# Altium PCB TailLightPrototypeRev3Lights.PcbDoc
Units mil, origin at the board's own origin, x right, y up, seen from the top; angles counter-clockwise.
Board outline 2835 x 1015 mil, 2 copper layers (Top Layer, Bottom Layer); 9 components, 41 nets, 27 pads, 415 vias.
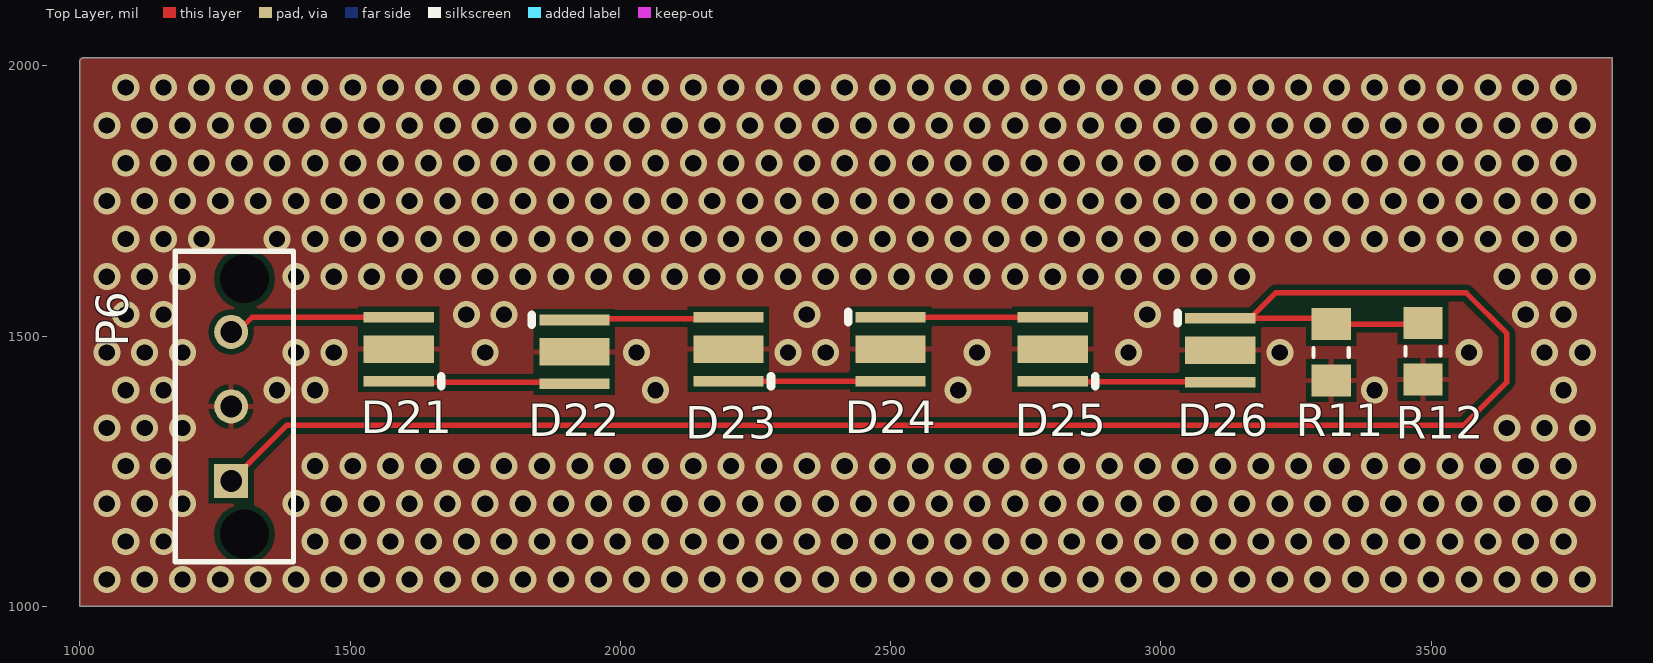
[diagram p0: Top Layer view]
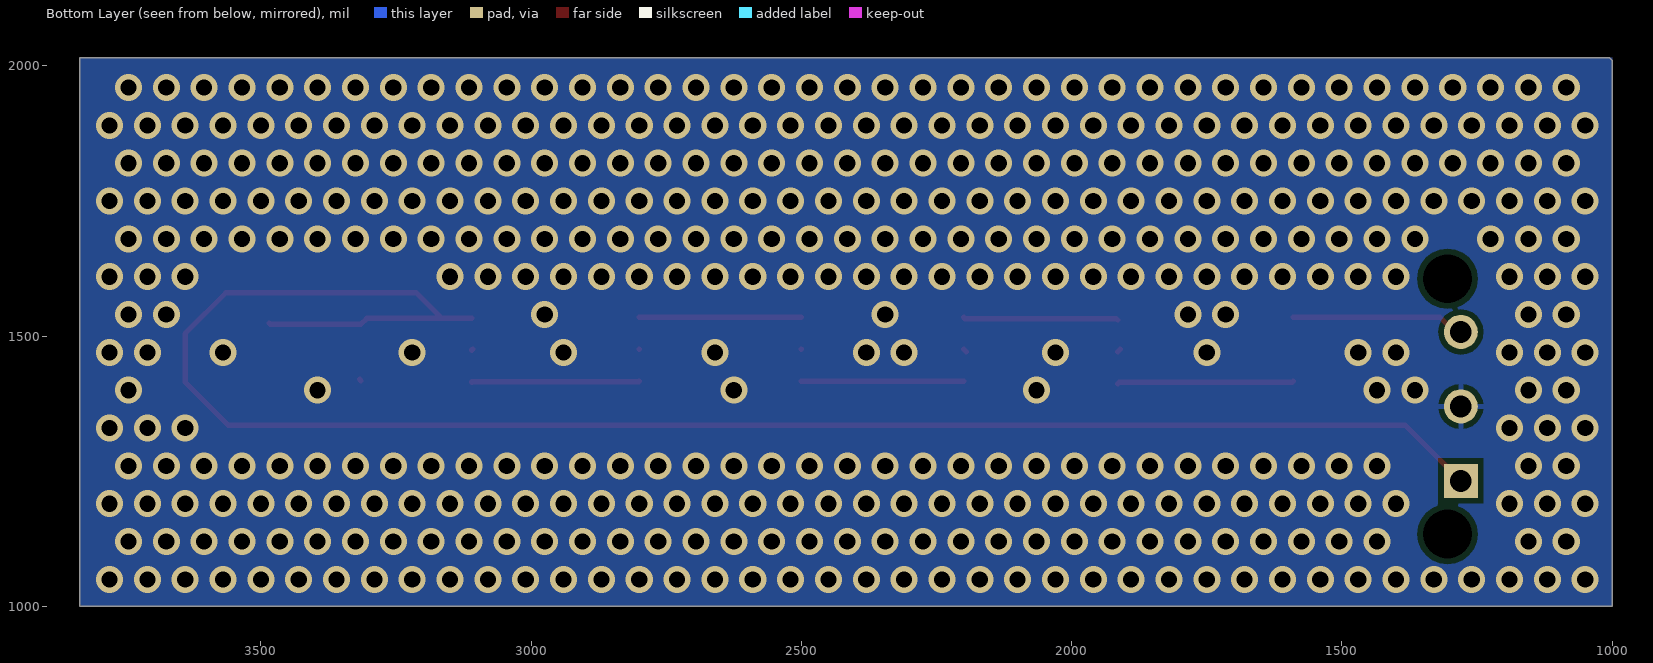
[diagram p1: Bottom Layer view, seen from below]
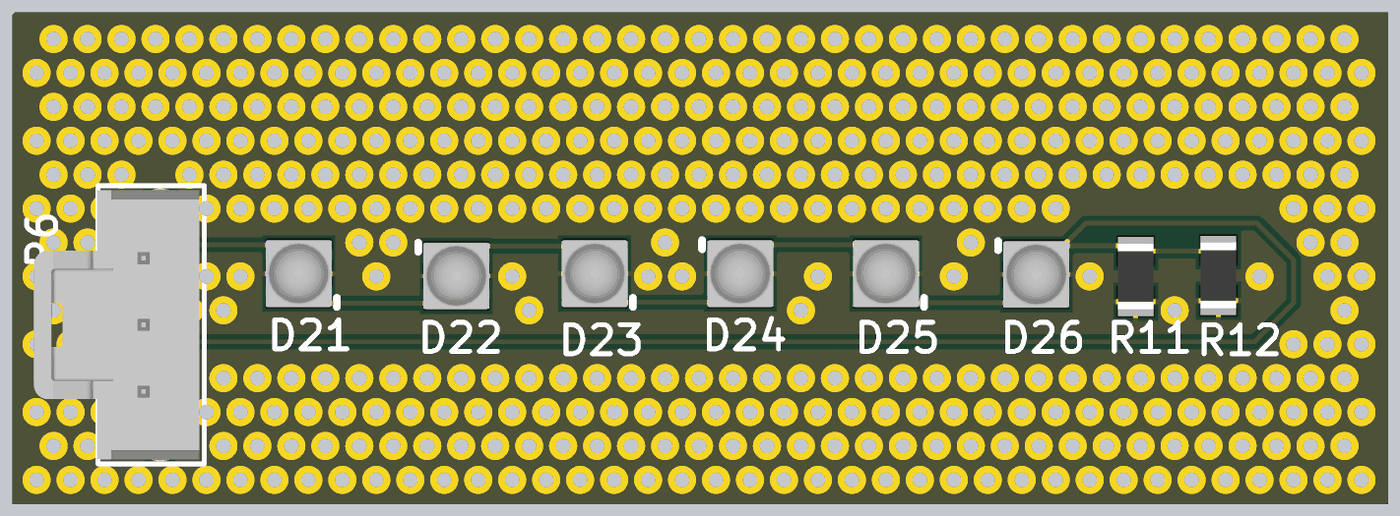
[diagram p2: 3D render of the assembled board from above, using the file's embedded part models]

## Layer stack, top to bottom
Top Solder: solder mask 0.4, Solder Resist, Dk 3.5
Top Layer: signal copper 1.4
Dielectric 1: dielectric 12.6, FR-4, Dk 4.8
Bottom Layer: signal copper 1.4
Bottom Solder: solder mask 0.4, Solder Resist, Dk 3.5

## Board outline
3835,2015 3835,1000 1000,1000 1000,2010 1005,2015

## Design rules (kind name [scope] priority, off if disabled: settings)
Clearance "Stitching GND_2" [IsStitchingVia and InNet('GND') vs (IsVia and (Not IsStitchingVia)) Or IsPad] p1: gap=10 ignorepadtopadclearanceinfootprint=FALSE
Clearance "Stitching GND_1" [IsStitchingVia and InNet('GND') vs (IsVia and (Not IsStitchingVia)) Or IsPad] p2: gap=10 ignorepadtopadclearanceinfootprint=FALSE
Clearance "Stitching GND" [IsStitchingVia and InNet('GND') vs (IsVia and (Not IsStitchingVia)) Or IsPad] p3: gap=10 ignorepadtopadclearanceinfootprint=FALSE
Clearance "Stitching No Net" [IsStitchingVia and InNet('No Net') vs (IsVia and (Not IsStitchingVia)) Or IsPad] p4: gap=5 ignorepadtopadclearanceinfootprint=FALSE
Clearance [All] p5: gap=10 ignorepadtopadclearanceinfootprint=FALSE except(0: Arc-Hole Track-Hole SMDPad-Hole THPad-Hole Via-Hole Fill-Hole Poly-Hole Region-Hole Text-Hole)
PolygonConnect [All] p1: connectstyle=Relief reliefconductorwidth=10 reliefentries=4 polygonreliefangle="90 Angle" airgapwidth=10
RoutingVias [All] p1: holewidth=28 width=50 viastyle="Through Hole" minholewidth=28 minwidth=50 maxholewidth=28 maxwidth=50
SolderMaskExpansion [All] p1: expansion=4
Width [All] p1: maxlimit=10 minlimit=10 preferedwidth=10
30 further rules are at their usual default settings.

## Components (designator, comment, footprint, x,y, rotation, side; value= is the part's Value field where it differs from the comment)
D21 "LED XLAMP COOL WHITE 5700K 2SMD" "LED CREE XP-E2 1414 2-SMD" 1590,1475.94 r270 top
D22 "LED XLAMP COOL WHITE 5700K 2SMD" "LED CREE XP-E2 1414 2-SMD" 1915,1470.94 r90 top
D23 "LED XLAMP COOL WHITE 5700K 2SMD" "LED CREE XP-E2 1414 2-SMD" 2200,1475.94 r270 top
D24 "LED XLAMP COOL WHITE 5700K 2SMD" "LED CREE XP-E2 1414 2-SMD" 2500,1475.94 r90 top
D25 "LED XLAMP COOL WHITE 5700K 2SMD" "LED CREE XP-E2 1414 2-SMD" 2800,1475.94 r270 top
D26 "LED XLAMP COOL WHITE 5700K 2SMD" "LED CREE XP-E2 1414 2-SMD" 3110,1474.06 r90 top
P6 "CONN 3POS ULTRA-FIT 0.138\"" "CONN, 3POS ULTRA-FIT" 1280,1232.2 r90 top
R11 "RES SMD 1.15 OHM 1% 1/4W 1206" "RES 1206" 3315,1470 r270 top
R12 "RES SMD 1.15 OHM 1% 1/4W 1206" "RES 1206" 3485,1472.17 r270 top

## Footprints (in the part's own frame and the unit in brackets; to place one, negate y for a bottom-side part, rotate by r counter-clockwise, add the part's x,y. Pads: shape width x height; smd on the part's side, far side on the other; paste and mask are expansions set on the pad)
"CONN, 3POS ULTRA-FIT" [mm]
  rect 1.6x1.6 hole 1.02: 1(0,0)
  round 1.6 hole 1.02: 2(3.5,0) 3(7,0)
  round 0 hole 2.3: ""(-2.5,-0.63) ""(9.5,-0.63)
  silkscreen extent -3.8,-2.93 10.8,2.62, body extent -3.55,-2.67 10.55,5.99, height 13.85
"LED CREE XP-E2 1414 2-SMD" [mm]
  rect 0.5x3.3 smd: 1(-1.5,0) 3(1.5,0)
  rect 1.3x3.3 smd: 2(0,0)
  silkscreen extent 1.27,2 1.75,2, body extent -1.73,-1.73 1.73,1.73, height 2.28
"RES 1206" [mm] "Chip Resistor, 2-Leads, Body 3.20x1.60mm, IPC Medium Density"
  rect 1.5x1.85 smd: 1(-1.325,0) 2(1.325,0)
  silkscreen extent -0.2,-0.82 0.2,0.82, body extent -1.73,-0.92 1.73,0.92, height 0.64

## Part data
D21 D22 D23 D25 D26: "LED Lighting XLamp® XP-E2 White, Cool 5700K 2.9V 350mA 110° 1414 (3535 Metric)", Case/Package=SMD/SMT, Color=White, Correlated Color Temperature (CCT)=5700K, Forward Voltage=2.8V, Manufacturer=Cree, Manufacturer Part Number=XPGBWT-L1-0000-00JE2, Max Current Rating=1.5A, Supplier Part Number 1=XPGBWT-L1-0000-00JE2CT-ND, Test Current=350mA, Thermal Resistance of Package=4°C/W, ComponentLink1Description=http://www.mouser.com/ds/2/90/XLampXPE2-253473.pdf?src-supplier=Mouser, ComponentLink1URL=http://www.mouser.com/ds/2/90/XLampXPE2-253473.pdf?src-supplier=Mouser, ComponentLink2Description=http://www.cree.com/~/media/Files/Cree/LED%20Components%20and%20Modules/XLamp/Data%20and%20Binning/XLampXPE2.pdf?src-supplier=Digi-Key, ComponentLink2URL=http://www.cree.com/~/media/Files/Cree/LED%20Components%20and%20Modules/XLamp/Data%20and%20Binning/XLampXPE2.pdf?src-supplier=Digi-Key, ComponentLink3Description=https://www.verical.com/server-webapp/html/getDatasheet?partID=702662&src-supplier=Verical, ComponentLink3URL=https://www.verical.com/server-webapp/html/getDatasheet?partID=702662&src-supplier=Verical, Lead Free="Lead Free", Length=3.45mm, Mount="Surface Mount", Packaging="Tape and Reel", Pricing 1="1 = 1.47000, 10 = 1.40100, 100 = 1.25340, 250 = 1.13988, 500 = 1.06762 (USD)", RoHS=Yes, Stock 1=6024, Supplier 1=Digi-Key, Viewing Angle=115°, Width=3.45mm
D24: "LED Lighting XLamp® XP-E2 White, Cool 5700K 2.9V 350mA 110° 1414 (3535 Metric)", Case/Package=SMD/SMT, Color=White, Correlated Color Temperature (CCT)=5700K, Forward Voltage=2.9V, Manufacturer=Cree, Manufacturer Part Number=XPGBWT-L1-0000-00JE2, Max Current Rating=1.5A, Supplier Part Number 1=XPGBWT-L1-0000-00JE2CT-ND, Test Current=350mA, Thermal Resistance of Package=4°C/W, ComponentLink1Description=http://www.mouser.com/ds/2/90/XLampXPE2-253473.pdf?src-supplier=Mouser, ComponentLink1URL=http://www.mouser.com/ds/2/90/XLampXPE2-253473.pdf?src-supplier=Mouser, ComponentLink2Description=http://www.cree.com/~/media/Files/Cree/LED%20Components%20and%20Modules/XLamp/Data%20and%20Binning/XLampXPE2.pdf?src-supplier=Digi-Key, ComponentLink2URL=http://www.cree.com/~/media/Files/Cree/LED%20Components%20and%20Modules/XLamp/Data%20and%20Binning/XLampXPE2.pdf?src-supplier=Digi-Key, ComponentLink3Description=https://www.verical.com/server-webapp/html/getDatasheet?partID=702662&src-supplier=Verical, ComponentLink3URL=https://www.verical.com/server-webapp/html/getDatasheet?partID=702662&src-supplier=Verical, Lead Free="Lead Free", Length=3.45mm, Mount="Surface Mount", Packaging="Tape and Reel", Pricing 1="1 = 1.47000, 10 = 1.40100, 100 = 1.25340, 250 = 1.13988, 500 = 1.06762 (USD)", RoHS=Yes, Stock 1=6024, Supplier 1=Digi-Key, Viewing Angle=115°, Width=3.45mm
P6: "3 Positions Header Connector 0.138\" (3.50mm) Through Hole Tin", Current Rating=-, Insulation Color=Black, Manufacturer 1="Molex, LLC", Manufacturer Part Number 1=1722871103, Material Flammability Rating="UL94 V-0", Operating Temperature="-40°C ~ 105°C", Supplier Part Number 1=WM11702-ND, Voltage=400V, ComponentLink1Description=http://www.molex.com/pdm_docs/sd/1722871103_sd.pdf, ComponentLink1URL=http://www.molex.com/pdm_docs/sd/1722871103_sd.pdf, Connector Type=Header, Contact Finish - Mating=Tin, Contact Finish - Post=Tin, Contact Finish Thickness - Mating="60µin (1.52µm)", Contact Finish Thickness - Post="60µin (1.52µm)", Contact Length - Mating=-, Contact Length - Post="0.126\" (3.20mm)", Contact Material="Copper Alloy", Contact Shape=Square, Contact Type="Male Pin", Fastening Type="Latch Holder", Ingress Protection=-, Insulation Height="0.465\" (11.80mm)", Insulation Material="Liquid Crystal Polymer (LCP)", Mated Stacking Heights=26.99mm, Mounting Type="Through Hole", Number of Positions=3, Number of Positions Loaded=All, Number of Rows=1, Overall Contact Length=-, Packaging=Tray, Part Status=Active, Pitch - Mating="0.138\" (3.50mm)", Row Spacing - Mating=-, Series=UltraFit, Shrouding="Shrouded - 4 Wall", Style="Board to Cable/Wire", Supplier 1=Digi-Key, Termination=Solder
R11 R12: Case/Package=1206, Manufacturer=Yageo, Manufacturer Part Number=RC1206FR-071R15L, Max Operating Temperature=155°C, Min Operating Temperature=-55°C, Resistance=1.15R, Supplier Part Number 1=311-1.15FRDKR-ND, Temperature Coefficient=200ppm/°C, Tolerance=1%, Voltage Rating (DC)=200V, Composition="Thick Film", Contact Plating=Tin,Matte, Lead Free="Lead Free", Pricing 1="1=0.15, 10=0.133, 100=0.0512, 1000=0.02252, 2500=0.01945 (USD)", Radiation Hardening=No, Stock 1=34622, Supplier 1=Digi-Key

## Via types
v1: diameter 50, hole 30, Top Layer to Bottom Layer, 415 vias

## Nets (pads, with @x,y where several pads share a name; then routed paths per layer and width w, separated by ;. In a path a pad name is that pad's centre, name@x,y a point inside that pad or via, vN(x,y) a via of type N, cw(c..) or ccw(c..) an arc to the next point about the centre after c; other vN are vias at no path point)
6V6: 
CTRL: 
FB: D26.3 P6.1 R11.1 R12.1 | length 3431.5
  Top Layer w10: P6.1 1382.8,1335 3560,1335 3640,1415 3640,1505 3565,1580 3212.01,1580 D26.3@3165.12,1533.11 ; D26.3 D26.3@3165.12,1533.11 ; R12.1 3482.83,1522.17 R11.1 3304.06,1533.11 D26.3@3165.12,1533.11
GND: D21.2 D22.2 D23.2 D24.2 D25.2 D26.2 P6.2 R11.2 R12.2 | length 19.9
  Top Layer w10: D22.2@1910,1475.94 D22.2 ; D23.2@2195,1470.94 D23.2 ; D26.2@3108.11,1475.94 D26.2 ; R11.2 R11.2@3317.17,1420
  other v1: 1050,1050 1120,1050 1190,1050 1260,1050 1330,1050 1400,1050 1470,1050 1540,1050 1610,1050 1680,1050 1750,1050 1820,1050 1890,1050 1960,1050 2030,1050 2100,1050 2170,1050 2240,1050 2310,1050 2380,1050 2450,1050 2520,1050 2590,1050 2660,1050 2730,1050 2800,1050 2870,1050 2940,1050 3010,1050 3080,1050 3150,1050 3220,1050 3290,1050 3360,1050 3430,1050 3500,1050 3570,1050 3640,1050 3710,1050 3780,1050 1085,1120 1155,1120 1435,1120 1505,1120 1575,1120 1645,1120 1715,1120 1785,1120 1855,1120 1925,1120 1995,1120 2065,1120 2135,1120 2205,1120 2275,1120 2345,1120 2415,1120 2485,1120 2555,1120 2625,1120 2695,1120 2765,1120 2835,1120 2905,1120 2975,1120 3045,1120 3115,1120 3185,1120 3255,1120 3325,1120 3395,1120 3465,1120 3535,1120 3605,1120 3675,1120 3745,1120 1050,1190 1120,1190 1190,1190 1400,1190 1470,1190 1540,1190 1610,1190 1680,1190 1750,1190 1820,1190 1890,1190 1960,1190 2030,1190 2100,1190 2170,1190 2240,1190 2310,1190 2380,1190 2450,1190 2520,1190 2590,1190 2660,1190 2730,1190 2800,1190 2870,1190 2940,1190 3010,1190 3080,1190 3150,1190 3220,1190 3290,1190 3360,1190 3430,1190 3500,1190 3570,1190 3640,1190 3710,1190 3780,1190 1085,1260 1155,1260 1435,1260 1505,1260 1575,1260 1645,1260 1715,1260 1785,1260 1855,1260 1925,1260 1995,1260 2065,1260 2135,1260 2205,1260 2275,1260 2345,1260 2415,1260 2485,1260 2555,1260 2625,1260 2695,1260 2765,1260 2835,1260 2905,1260 2975,1260 3045,1260 3115,1260 3185,1260 3255,1260 3325,1260 3395,1260 3465,1260 3535,1260 3605,1260 3675,1260 3745,1260 1050,1330 1120,1330 1190,1330 3640,1330 3710,1330 3780,1330 1085,1400 1155,1400 1365,1400 1435,1400 2065,1400 2625,1400 3395,1400 3745,1400 1050,1470 1120,1470 1190,1470 1400,1470 1470,1470 1750,1470 2030,1470 2310,1470 2380,1470 2660,1470 2940,1470 3220,1470 3570,1470 3710,1470 3780,1470 1085,1540 1155,1540 1715,1540 1785,1540 2345,1540 2975,1540 3675,1540 3745,1540 1050,1610 1120,1610 1190,1610 1400,1610 1470,1610 1540,1610 1610,1610 1680,1610 1750,1610 1820,1610 1890,1610 1960,1610 2030,1610 2100,1610 2170,1610 2240,1610 2310,1610 2380,1610 2450,1610 2520,1610 2590,1610 2660,1610 2730,1610 2800,1610 2870,1610 2940,1610 3010,1610 3080,1610 3150,1610 3640,1610 3710,1610 3780,1610 1085,1680 1155,1680 1225,1680 1365,1680 1435,1680 1505,1680 1575,1680 1645,1680 1715,1680 1785,1680 1855,1680 1925,1680 1995,1680 2065,1680 2135,1680 2205,1680 2275,1680 2345,1680 2415,1680 2485,1680 2555,1680 2625,1680 2695,1680 2765,1680 2835,1680 2905,1680 2975,1680 3045,1680 3115,1680 3185,1680 3255,1680 3325,1680 3395,1680 3465,1680 3535,1680 3605,1680 3675,1680 3745,1680 1050,1750 1120,1750 1190,1750 1260,1750 1330,1750 1400,1750 1470,1750 1540,1750 1610,1750 1680,1750 1750,1750 1820,1750 1890,1750 1960,1750 2030,1750 2100,1750 2170,1750 2240,1750 2310,1750 2380,1750 2450,1750 2520,1750 2590,1750 2660,1750 2730,1750 2800,1750 2870,1750 2940,1750 3010,1750 3080,1750 3150,1750 3220,1750 3290,1750 3360,1750 3430,1750 3500,1750 3570,1750 3640,1750 3710,1750 3780,1750 1085,1820 1155,1820 1225,1820 1295,1820 1365,1820 1435,1820 1505,1820 1575,1820 1645,1820 1715,1820 1785,1820 1855,1820 1925,1820 1995,1820 2065,1820 2135,1820 2205,1820 2275,1820 2345,1820 2415,1820 2485,1820 2555,1820 2625,1820 2695,1820 2765,1820 2835,1820 2905,1820 2975,1820 3045,1820 3115,1820 3185,1820 3255,1820 3325,1820 3395,1820 3465,1820 3535,1820 3605,1820 3675,1820 3745,1820 1050,1890 1120,1890 1190,1890 1260,1890 1330,1890 1400,1890 1470,1890 1540,1890 1610,1890 1680,1890 1750,1890 1820,1890 1890,1890 1960,1890 2030,1890 2100,1890 2170,1890 2240,1890 2310,1890 2380,1890 2450,1890 2520,1890 2590,1890 2660,1890 2730,1890 2800,1890 2870,1890 2940,1890 3010,1890 3080,1890 3150,1890 3220,1890 3290,1890 3360,1890 3430,1890 3500,1890 3570,1890 3640,1890 3710,1890 3780,1890 1085,1960 1155,1960 1225,1960 1295,1960 1365,1960 1435,1960 1505,1960 1575,1960 1645,1960 1715,1960 1785,1960 1855,1960 1925,1960 1995,1960 2065,1960 2135,1960 2205,1960 2275,1960 2345,1960 2415,1960 2485,1960 2555,1960 2625,1960 2695,1960 2765,1960 2835,1960 2905,1960 2975,1960 3045,1960 3115,1960 3185,1960 3255,1960 3325,1960 3395,1960 3465,1960 3535,1960 3605,1960 3675,1960 3745,1960
NetC2_1: 
NetC3_1: 
NetC4_1: 
NetC5_2: 
NetC9_1: 
NetC11_1: 
NetC12_1: 
NetC17_1: 
NetD1_3: 
NetD2_3: 
NetD3_3: 
NetD4_3: 
NetD7_3: 
NetD8_3: 
NetD9_1: 
NetD10_3: 
NetD12_3: 
NetD13_3: 
NetD14_3: 
NetD15_1: 
NetD16_2: 
NetD19_1: 
NetD20_2: 
NetD21_3: D21.3 D22.1 | length 327.1
  Top Layer w10: D21.3 1592.5,1414.39 1912.5,1414.39 D22.1
NetD22_3: D22.3 D23.1 | length 287.1
  Top Layer w10: D22.3 1917.5,1532.5 2197.5,1532.5 D23.1
NetD23_3: D23.3 D24.1 | length 300
  Top Layer w10: D23.3 D24.1
NetD24_3: D24.3 D25.1 | length 300
  Top Layer w10: D24.3 D25.1
NetD25_3: D25.3 D26.1 | length 310.8
  Top Layer w10: D25.3 2800.94,1415.94 3109.06,1415.94 D26.1
NetR2_2: 
NetR3_2: 
NetR4_2: 
NetR8_2: 
NetR9_2: 
SW: 
VBAT: 
VDD: 
VIN: D21.1 P6.3 | length 321.3
  Top Layer w10: P6.3 1291.35,1507.8 1318.55,1535 D21.1
pads on no net: P6.

## Polygon pours and split planes (outlines as drawn)
GND on Top Layer (solid, pour order 4): 1000,1000 1000,2015 3835,2015 3835,1005 3830,1000
GND on Bottom Layer (solid, pour order 6): 1000,2015 1000,1000 3830,1000 3835,1005 3835,2015